# Altium PCB PCB1.PcbDoc (part 2 of 2)
Units mm, origin at the board's own origin, x right, y up, seen from the top; angles counter-clockwise.
Board outline 32 x 32 mm, 4 copper layers (Component Side, Ground Plane, Power Plane, Solder Side), stack 0.844 mm thick; 67 components, 43 nets, 247 pads, 412 vias.
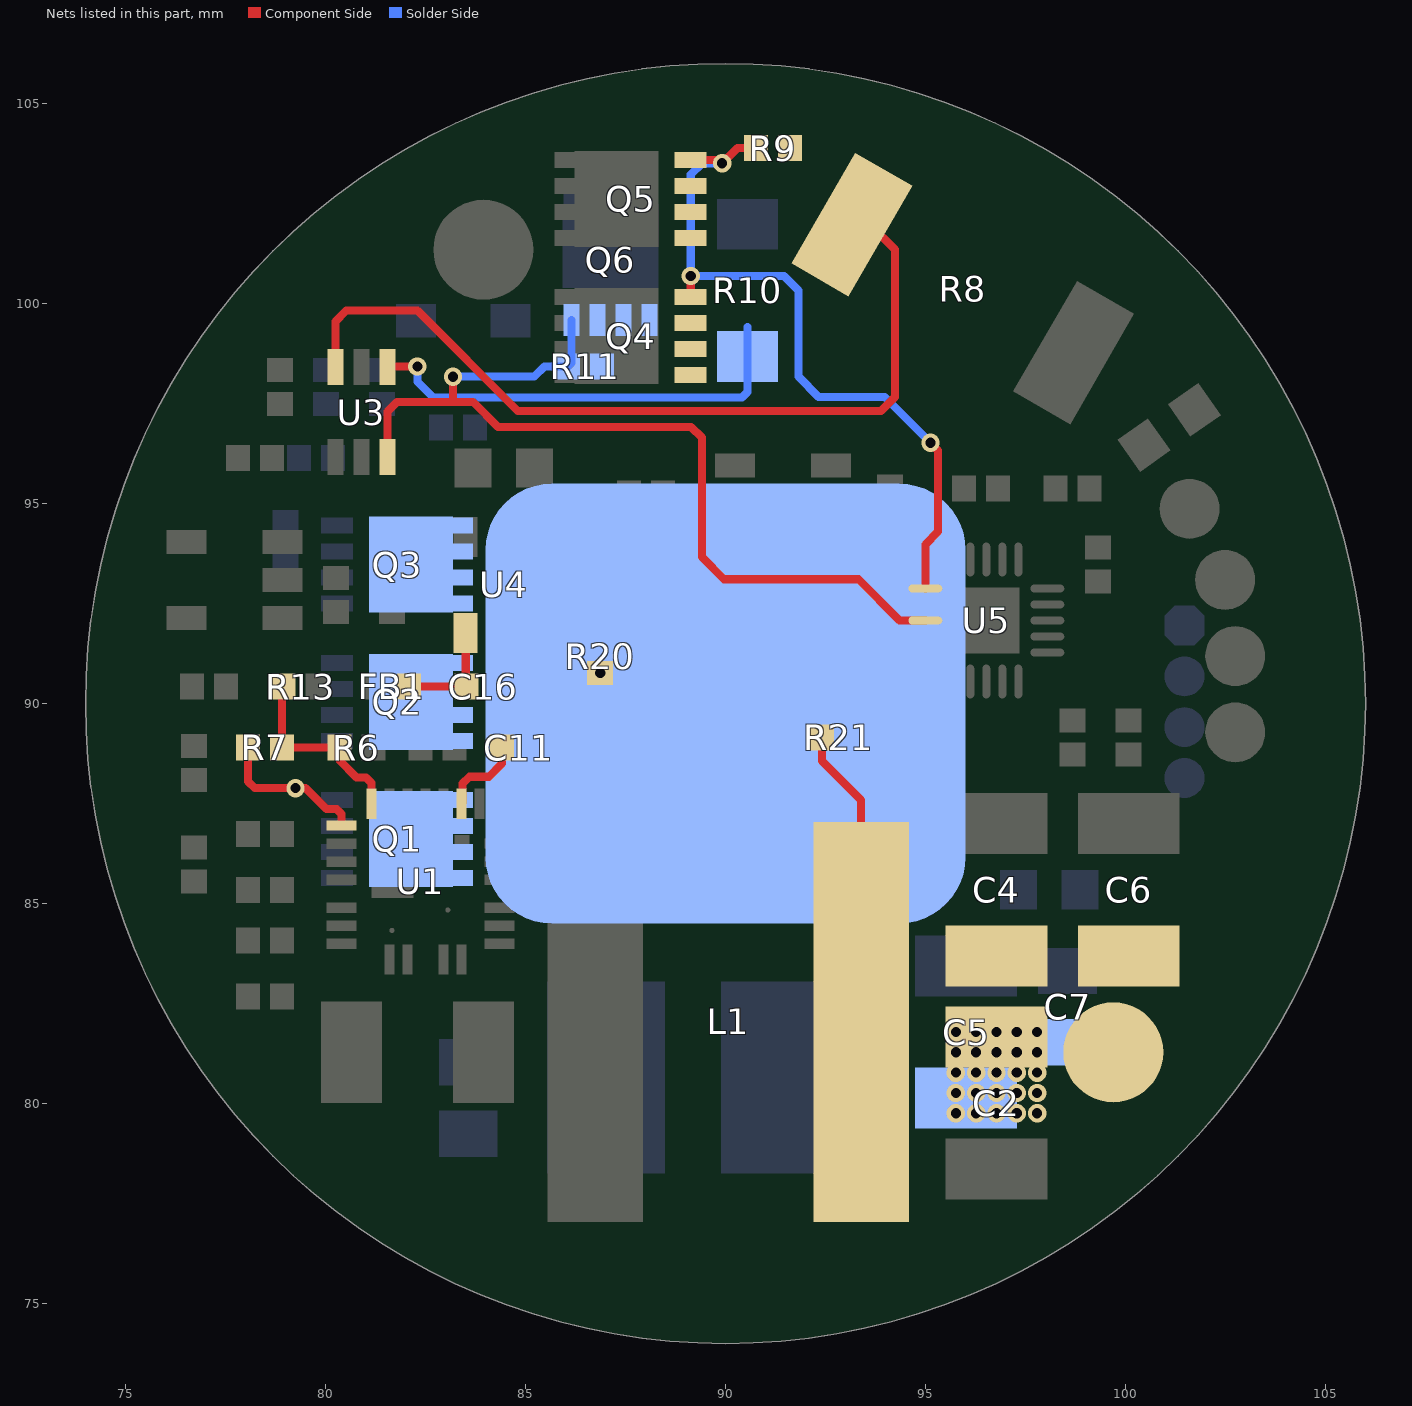
[diagram p4: the nets of this part, all layers, seen from the top]

## Via types
v1: diameter 0.457, hole 0.254, Component Side to Solder Side, tented both sides, 412 vias

## Nets (pads, with @x,y where several pads share a name; then routed paths per layer and width w, separated by ;. In a path a pad name is that pad's centre, name@x,y a point inside that pad or via, vN(x,y) a via of type N, cw(c..) or ccw(c..) an arc to the next point about the centre after c; other vN are vias at no path point) (continued)
VBAT: pad.6 Q1.5 Q1.6 Q1.7 Q1.8 Q2.5 Q2.6 Q2.7 Q2.8 Q3.5 Q3.6 Q3.7 Q3.8 R20.2
  other v1: 86.868,90.761
VDRV: C11.2 U1.12 | length 2.1
  Component Side w0.203: U1.12@83.398,87.496 83.426,87.524 83.426,87.997 83.599,88.169 84.083,88.169 84.411,88.497 C11.2@84.411,88.9
VFB: R6.1 R7.2 R13.2 U1.17 | length 4.9
  Component Side w0.203: R13.2@78.95,90.424 78.911,90.385 R7.2@78.911,88.9 R6.1@80.347,88.9 80.347,88.581 80.775,88.153 81.011,88.153 81.153,88.011 81.153,87.501 U1.17@81.148,87.496
VHIGH: Q4.1 Q4.2 Q4.3 Q5.1 Q5.2 Q5.3 R8.2 R9.1 U3.3 | length 21.4
  Component Side w0.203: U3.3@80.249,98.407 80.249,99.553 80.518,99.822 82.296,99.822 84.806,97.312 93.883,97.312 94.234,97.663 94.234,101.346 93.607,101.973 R8.2@93.161,101.973
VHSG: Q4.4 Q5.4 R9.2 U5.6 | length 18.7
  Component Side w0.203: Q4.4@89.13,100.162 v1(89.13,100.687) v1@89.154,100.711 ; Q5.4@89.13,103.591 89.83,103.591 v1(89.916,103.505) 90.297,103.886 R9.2@90.761,103.886 ; U5.6@94.995,92.875 94.995,93.979 95.316,94.3 95.316,96.327 v1(95.123,96.52)
  Solder Side w0.203: v1(89.916,103.505) 89.408,103.505 89.13,103.227 v1(89.13,100.687) 91.464,100.687 91.821,100.33 91.821,98.171 92.329,97.663 93.98,97.663 v1(95.123,96.52)
VLDO: C16.2 FB1.2 U4.1 | length 2.7
  Component Side w0.203: FB1.2@82.086,90.424 C16.2@83.522,90.424 83.505,90.441 U4.1@83.505,91.637
VLED+: C2.2 C4.2 C5.2 C6.2 C7.2 L1.2 pad.0@99.695,81.28 R7.1 R21.2 U1.18 | length 11.5
  Component Side w0.203: R7.1@78.061,88.9 78.061,88.055 78.232,87.884 v1(79.248,87.884) 79.502,87.884 80.025,87.361 80.279,87.361 80.398,87.242 U1.18@80.398,86.946 ; R21.2@92.412,89.281 92.412,88.563 93.391,87.584 L1.2@93.391,82.042
  other v1: 95.758,79.756 96.266,79.756 96.774,79.756 97.282,79.756 97.79,79.756 95.758,80.264 96.266,80.264 96.774,80.264 97.282,80.264 97.79,80.264 95.758,80.772 96.266,80.772 96.774,80.772 97.282,80.772 97.79,80.772 95.758,81.28 96.266,81.28 96.774,81.28 97.282,81.28 97.79,81.28 95.758,81.788 96.266,81.788 96.774,81.788 97.282,81.788 97.79,81.788
VLOW: Q6.1 Q6.2 Q6.3 R10.2 R11.2 U3.1 | length 11.2
  Component Side w0.203: U3.1@81.549,98.407 81.567,98.425 v1(82.296,98.425)
  Solder Side w0.203: v1(82.296,98.425) 82.296,98.044 82.692,97.648 90.409,97.648 90.551,97.79 R10.2@90.551,98.679 90.551,99.416
VLSG: Q6.4 R11.1 U3.6 U5.8 | length 23.5
  Component Side w0.203: U3.6@81.549,96.157 81.549,97.297 81.788,97.536 83.185,97.536 ; v1(83.185,98.171) 83.185,97.536 ; U5.8@94.995,92.075 94.352,92.075 93.32,93.106 89.963,93.106 89.408,93.661 89.408,96.647 89.139,96.916 84.313,96.916 83.693,97.536 83.185,97.536
  Solder Side w0.203: v1(83.185,98.171) 85.217,98.171 85.471,98.425 R11.1@86.062,98.425 86.147,98.51 Q6.4@86.147,99.592
pads on no net: U1.10 U1.11 U1.14 U1.28 U4.2 U5.13 U5.19

## Polygon pours and split planes (outlines as drawn)
GND on Solder Side "Component Side-No Net 1" (solid, remove dead copper, pour order 46): 72.898,108.331 72.898,75.946 74.549,74.295 76.2,72.644 107.95,72.644 107.95,73.787 111.506,77.343 111.252,77.597 111.252,104.14 111.252,106.045 109.093,108.204 108.839,108.458 96.774,108.458
12V on Solder Side "Component Side-No Net 1" (solid, remove dead copper, pour order 49): 78.476,94.039 75.497,94.039 75.438,93.98 75.692,93.726 75.692,83.947 75.692,83.82 77.597,81.915 77.851,82.169 79.629,82.169 79.629,93.599 79.248,93.98
GND on Solder Side "Component Side-No Net 1" (solid, remove dead copper, pour order 50): 78.359,80.01 78.486,79.883 85.344,79.883 85.429,79.883 88.625,83.079 88.858,83.312 94.234,83.312 94.234,74.93 93.98,74.676 82.804,74.676 79.375,74.676 78.232,75.819
GND on Solder Side "Component Side-No Net 1" (solid, remove dead copper, pour order 53): 82.296,84.963 83.947,84.963 83.947,83.185 82.042,83.185
VBAT on Solder Side "Component Side-No Net 1" (solid, remove dead copper, pour order 54): 83.566,95.885 96.012,95.885 96.012,84.455 88.138,84.455 84.709,84.455 83.82,85.344 83.693,85.471 81.026,85.471 81.026,94.742 83.566,94.742
VBAT on Solder Side "Component Side-No Net 1" (solid, remove dead copper, pour order 56): 84.709,84.455 80.518,84.455 80.518,86.36 81.026,86.868 85.217,86.868
GND on Solder Side "Component Side-No Net 1" (solid, remove dead copper, pour order 58): 82.371,85.145 93.798,85.145 94.234,84.709 94.234,82.931 82.169,82.931 82.042,83.058
VLED+ on Solder Side "Component Side-No Net 1" (solid, remove dead copper, pour order 61): 95.377,82.042 98.171,82.042 98.171,79.248 95.377,79.248
VLED+ on Solder Side "Component Side-No Net 1" (solid, remove dead copper, pour order 62): 94.742,82.042 94.869,82.169 99.314,82.169 99.314,80.899 99.187,80.772 98.679,80.772 98.552,80.772 98.425,80.645 98.298,80.518 98.298,79.629 98.298,79.375 98.171,79.248 95.377,79.248 94.742,79.248
GND on Solder Side "Component Side-No Net 1" (solid, remove dead copper, pour order 63): 87.63,84.201 88.138,84.709 104.013,84.709 104.013,76.327 104.267,76.073 100.076,71.882 93.98,71.882 88.646,71.882 88.519,72.009
VLOW on Solder Side "Component Side-No Net 1" (solid, remove dead copper, pour order 65): 86.487,100.203 86.487,97.917 91.44,97.917 91.44,100.203
LED- on Solder Side "Component Side-No Net 1" (solid, remove dead copper, pour order 66): 85.725,100.33 85.852,100.203 89.027,100.203 89.027,103.124 89.13,103.227 89.073,103.284 85.684,103.284
GND on Solder Side "Component Side-No Net 1" (solid, remove dead copper, pour order 67): 89.281,101.219 93.472,101.219 93.98,101.727 93.98,103.124 95.504,104.648 85.725,104.775 85.344,104.394 85.598,104.14 85.598,102.743
5V on Solder Side "Component Side-No Net 1" (solid, remove dead copper, pour order 73): 81.915,96.266 83.566,96.266 83.439,96.139 83.439,94.869 82.042,94.869 81.915,94.742
GND on Solder Side "Component Side-No Net 1" (solid, remove dead copper, pour order 79): 76.073,93.091 94.996,93.091 95.123,93.218 96.012,94.107 96.012,106.299 77.089,106.299 76.708,106.68
GND on Solder Side "Component Side-No Net 1" (solid, remove dead copper, pour order 85): 93.98,103.759 95.25,102.489 95.25,81.153 109.855,81.153 110.236,80.772 109.855,81.153 109.855,104.267
GND on Solder Side "Component Side-No Net 1" (solid, remove dead copper, pour order 86): 79.629,79.883 84.558,79.883 84.893,79.547 84.963,79.478 84.963,77.978 84.963,76.962 84.836,76.835 84.632,76.631 81.808,76.631
12V on Solder Side "Component Side-No Net 1" (solid, remove dead copper, pour order 87): 76.581,94.996 81.534,94.996 81.788,94.742 86.106,90.424 86.106,82.423 86.106,75.946 85.725,75.565 76.708,75.565 74.295,75.565 73.66,76.2
12V on Solder Side "Component Side-No Net 1" (solid, remove dead copper, pour order 88): 85.217,77.089 85.725,77.597 91.059,77.597 91.059,84.328 90.297,85.09 89.916,84.709 82.804,84.709 82.804,77.343 83.185,76.962
GND on Solder Side "Component Side-No Net 1" (solid, remove dead copper, pour order 45): 91.059,84.328 91.313,84.582 101.981,84.582 101.981,79.842 101.514,79.375 99.355,77.216 97.917,77.216 91.567,77.216 91.059,76.708
12V on Component Side "Component Side-No Net 1" (solid, remove dead copper, pour order 47): 81.026,84.963 82.296,84.963 82.296,80.01 82.042,80.01 80.772,80.01 79.629,80.01 79.629,82.55 79.629,83.058 80.264,83.693 80.772,83.693 80.899,83.82 80.899,84.836
GND on Component Side "Component Side-No Net 1" (solid, remove dead copper, pour order 48): 82.423,85.979 83.947,85.979 83.947,83.312 84.455,82.804 84.836,82.423 84.836,79.883 84.836,73.533 84.582,73.787 77.851,73.787 77.851,76.073 76.962,76.962 77.47,77.47 77.47,82.042 80.645,82.042 81.153,82.55
SW on Component Side "Component Side-No Net 1" (solid, remove dead copper, pour order 51): 83.969,86.173 84.029,86.233 84.709,86.233 84.836,86.233 84.963,86.36 84.963,86.868 84.963,86.995 85.09,87.122 88.011,87.122 88.011,77.089 87.884,76.962 85.979,76.962 84.455,76.962 83.271,78.146 83.271,83.471 83.271,86.02 83.185,86.106
GND on Component Side "Component Side-No Net 1" (solid, remove dead copper, pour order 52): 81.153,86.741 83.058,86.741 83.058,85.972 83.03,85.944 83.058,85.916 83.058,85.09 81.28,85.09 81.153,85.217
VLED+ on Component Side "Component Side-No Net 1" (solid, remove dead copper, pour order 59): 92.075,87.376 95.123,87.376 95.25,87.249 95.25,86.233 95.25,86.106 95.504,85.852 101.509,85.852 101.509,80.784 99.822,79.375 97.028,79.375 94.869,79.375 94.742,79.248 94.742,76.962 92.202,76.962 92.075,77.089
GND on Component Side "Component Side-No Net 1" (solid, remove dead copper, pour order 60): 95.123,88.011 105.791,88.011 105.918,87.884 106.172,87.63 106.172,79.375 106.172,72.898 105.791,72.517 105.537,72.263 89.916,72.263 84.455,72.263 83.058,73.66 83.439,74.041 83.439,77.47 84.525,77.47 85.033,76.962 93.218,76.962 94.615,76.962 94.742,77.089 94.742,79.629 94.742,87.63 95.123,88.011
LED- on Component Side "Component Side-No Net 1" (solid, remove dead copper, pour order 64): 82.55,102.743 84.836,102.743 85.217,102.743 85.471,102.997 85.471,104.14 88.392,104.14 88.519,104.013 88.646,103.886 88.646,97.663 84.836,97.663 82.55,99.949
GND on Component Side "Component Side-No Net 1" (solid, remove dead copper, pour order 68): 97.028,97.79 98.044,96.774 99.441,96.774 99.568,96.774 102.997,100.203 103.124,100.33 103.124,104.521 102.997,104.521 99.441,108.077 97.028,105.664 97.028,101.346
GND on Component Side "Component Side-No Net 1" (solid, remove dead copper, pour order 69): 97.028,101.727 83.058,101.727 81.407,103.378 82.804,104.775 82.804,107.442 82.931,107.442 83.693,108.204 98.552,108.204 98.552,103.554 100.183,101.923
GND on Component Side "Component Side-No Net 1" (solid, remove dead copper, pour order 70): 75.311,94.488 78.359,94.615 78.359,93.345 78.359,81.019 77.435,80.094 77.35,80.01 73.406,80.01 73.406,93.726 71.755,95.377
GND on Component Side "Component Side-No Net 1" (solid, remove dead copper, pour order 71): 79.8,91.015 79.8,95.294 80.137,95.631 81.534,95.631 82.169,95.631 82.55,96.012 83.185,96.647 83.185,99.822 83.185,105.41 83.058,105.537 82.423,104.902 71.501,104.902 71.501,97.917 71.12,97.536 71.12,93.091 71.12,91.948 71.501,91.567
5V on Component Side "Component Side-No Net 1" (solid, remove dead copper, pour order 72): 83.058,93.472 84.201,93.472 84.201,96.393 83.058,96.393 81.788,96.393 81.788,94.996 81.788,94.742 83.058,94.742
GND on Component Side "Component Side-No Net 1" (solid, remove dead copper, pour order 74): 84.709,96.52 86.868,96.52 86.868,95.504 86.741,95.377 86.36,95.377 86.106,95.377 85.979,95.25 85.979,92.964 85.979,90.043 85.852,89.916 84.201,89.916 84.074,89.916 83.947,90.043 83.947,91.059 84.074,91.059 84.836,91.059 84.836,93.726 84.582,93.98 84.582,96.393
GND on Component Side "Component Side-No Net 1" (solid, remove dead copper, pour order 75): 81.236,89.833 81.28,89.789 85.979,89.789 85.979,87.376 85.979,87.249 84.328,87.249 84.201,87.376 84.074,87.503 84.074,87.884 81.28,87.884 81.153,88.011 80.645,88.519 80.645,88.646 80.645,89.662
GND on Component Side "Component Side-No Net 1" (solid, remove dead copper, pour order 76): 79.339,95.664 79.372,95.631 84.074,95.631 84.074,93.345 83.947,93.218 83.947,92.329 83.947,90.678 83.82,90.551 82.694,89.425 79.013,89.425 78.215,89.425 78.105,89.535 76.454,91.186 76.454,95.631
GND on Component Side "Component Side-No Net 1" (solid, remove dead copper, pour order 77): 79.849,96.259 83.235,96.259 84.398,95.096 84.702,94.791 85.959,94.791 85.959,98.953 85.598,99.314 84.074,100.838 84.074,102.235 78.867,102.235 78.232,101.6
5V on Component Side "Component Side-No Net 1" (solid, remove dead copper, pour order 78): 81.788,94.742 81.788,97.536 83.693,97.536 84.313,96.916 84.567,96.916 84.709,96.774 84.836,96.647 84.836,93.726 83.566,93.726 83.439,93.599 83.185,93.853 81.407,93.853
GND on Component Side "Component Side-No Net 1" (solid, remove dead copper, pour order 80): 85.979,87.409 86.2,87.63 89.535,87.63 94.361,87.63 94.996,88.265 95.123,88.392 96.901,88.392 96.901,96.774 96.647,97.028 96.363,97.312 93.472,97.312 82.266,97.312 82.042,97.536 82.048,97.53 82.048,87.496
GND on Component Side "Component Side-No Net 1" (solid, remove dead copper, pour order 81): 91.226,91.382 92.422,91.382 92.529,91.275 94.45,91.275 94.45,92.164 94.742,92.456 94.092,93.106 91.642,93.106 90.693,93.106 90.424,92.837 90.551,92.71 90.551,91.059
VHIGH on Component Side "Component Side-No Net 1" (solid, remove dead copper, pour order 82): 88.449,97.663 92.71,97.663 93.599,97.663 93.853,97.917 93.853,100.076 93.853,100.711 93.472,101.092 93.472,101.973 94.242,101.973 94.488,101.727 95.25,101.727 95.25,103.632 95.123,103.759 94.869,104.013 93.472,104.013 92.71,104.013 92.456,104.267 92.329,104.394 91.186,104.394 91.186,104.013 91.059,103.886 90.868,104.077 88.455,104.077
GND on Component Side "Component Side-No Net 1" (solid, remove dead copper, pour order 83): 87.757,97.536 96.901,97.536 97.409,97.028 97.906,96.531 99.695,96.531 101.219,96.647 101.727,96.139 102.616,95.25 102.616,94.742 102.616,94.488 103.124,93.98 103.378,93.726 103.378,92.964 103.378,91.948 103.632,91.694 103.632,90.043 103.632,88.519 103.378,88.265 96.774,88.265 94.488,88.265 94.361,88.392 94.117,88.636 93.755,88.636
GND on Component Side "Component Side-No Net 1" (solid, remove dead copper, pour order 84): 95.32,102.033 94.742,101.455 94.742,97.79 97.028,97.79 97.409,97.409 99.06,97.409 100.711,97.409 101.092,97.028 102.489,95.631 102.489,94.996 102.489,93.345 102.87,92.964 102.997,92.837 102.997,92.583 102.997,92.456 103.505,91.948 103.632,91.821 103.632,91.059 103.632,90.551 103.251,90.17 102.235,90.17 101.197,90.17 100.853,89.826 100.584,89.557 100.584,88.392 99.314,88.392 99.314,87.376 108.077,87.376 108.204,87.249 108.331,87.376 108.331,103.759 103.378,103.759 99.06,108.077
GND on Component Side "Component Side-No Net 1" (solid, remove dead copper, pour order 57): 84.201,96.774 84.328,96.647 86.614,96.647 86.614,92.837 86.36,92.583 86.106,92.329 86.106,90.678 85.217,90.678 84.963,90.932 84.455,91.44 84.455,92.71 84.455,94.361 84.074,94.742 83.947,94.869 83.947,96.901
GND on Component Side "Component Side-No Net 1" (solid, remove dead copper, pour order 55): 88.138,96.647 88.138,92.964 88.265,93.091 89.662,93.091 89.662,96.901 89.408,97.155 89.281,97.028 88.392,97.028
GND on Ground Plane (split plane): 79.198,99.73 79.24,99.702 79.29,99.693 85.163,99.693 85.711,99.145 85.753,99.117 85.802,99.107 88.653,99.107 88.671,99.111 88.681,99.095 88.723,99.067 88.773,99.058 93.926,99.058 95.666,97.317 95.708,97.289 95.758,97.28 96.847,97.28 98.679,95.448 98.679,88.575 98.371,88.267 82.731,88.267 81.663,89.335 81.663,91.948 81.654,91.998 81.626,92.04 81.372,92.294 81.33,92.322 81.28,92.331 74.686,92.331 74.754,92.751 74.862,93.293 74.989,93.831 75.136,94.365 75.301,94.892 75.485,95.414 75.687,95.929 75.908,96.436 76.147,96.934 76.403,97.424 76.677,97.905 76.967,98.376 77.275,98.835 77.598,99.284 77.937,99.721 78.292,100.145 78.525,100.404
GND on Ground Plane (split plane): 203 vertices, not listed, extent 74.508,74.508 105.492,105.492
5V on Power Plane (split plane): 97.952,96.301 97.994,96.273 98.044,96.264 99.387,96.264 101.979,93.672 101.979,88.065 101.219,87.305 101.094,87.43 101.094,89.154 101.085,89.204 101.057,89.246 100.168,90.135 100.126,90.163 100.076,90.172 99.368,90.172 98.554,90.986 98.554,94.361 98.545,94.411 98.517,94.453 98.136,94.834 98.094,94.862 98.044,94.871 97.282,94.871 97.232,94.862 97.19,94.834 97.063,94.707 97.035,94.665 97.026,94.615 97.026,94.107 97.035,94.057 97.063,94.015 97.534,93.545 97.534,89.916 97.543,89.866 97.571,89.824 98.079,89.316 98.121,89.288 98.171,89.279 99.768,89.279 100.201,88.846 100.201,87.43 99.895,87.124 85.398,87.124 84.166,88.357 84.124,88.385 84.074,88.394 82.604,88.394 82.301,88.697 82.301,92.202 82.291,92.252 82.263,92.294 82.221,92.322 82.171,92.331 81.028,92.331 81.028,95.123 81.019,95.173 80.991,95.215 80.737,95.469 80.695,95.497 80.645,95.506 80.393,95.506 80.393,96.466 80.445,96.518 83.131,96.518 83.437,96.212 83.437,94.996 83.446,94.946 83.474,94.904 83.982,94.396 84.024,94.368 84.074,94.359 90.551,94.359 90.601,94.368 90.643,94.396 90.897,94.65 90.925,94.692 90.934,94.742 90.934,96.139 90.934,96.774 90.925,96.824 90.897,96.866 90.643,97.12 90.601,97.148 90.551,97.157 89.789,97.157 89.739,97.148 89.697,97.12 89.606,97.028 88.013,97.028 88.013,98.169 96.085,98.169
NetD2_1 on Power Plane (split plane): 87.755,98.244 87.755,95.506 86.616,95.506 86.616,97.79 86.607,97.84 86.579,97.882 86.325,98.136 86.283,98.164 86.233,98.173 84.636,98.173 84.203,98.606 84.203,99.006 84.255,99.058 86.941,99.058
OPOUT on Power Plane (split plane): 98.296,94.307 98.296,90.932 98.305,90.882 98.333,90.84 99.222,89.951 99.264,89.923 99.314,89.914 100.022,89.914 100.836,89.1 100.836,87.376 100.845,87.326 100.873,87.284 101.036,87.122 100.276,86.362 84.89,86.362 83.658,87.595 83.616,87.623 83.566,87.632 81.028,87.632 81.028,92.073 82.042,92.073 82.042,88.644 82.052,88.594 82.08,88.552 82.458,88.173 82.5,88.145 82.55,88.136 84.02,88.136 85.252,86.903 85.294,86.875 85.344,86.866 99.949,86.866 99.999,86.875 100.041,86.903 100.422,87.284 100.45,87.326 100.459,87.376 100.459,88.9 100.45,88.95 100.422,88.992 99.914,89.5 99.872,89.528 99.822,89.537 98.225,89.537 97.792,89.97 97.792,93.599 97.783,93.649 97.755,93.691 97.284,94.161 97.284,94.561 97.336,94.613 97.99,94.613
12V on Power Plane (split plane): 82.167,85.163 82.167,80.445 82.115,80.393 79.683,80.393 79.377,80.699 79.377,83.131 80.737,84.49 80.765,84.532 80.774,84.582 80.774,85.215 82.115,85.215
DCDCEN on Power Plane (split plane): 79.918,97.444 79.96,97.416 80.01,97.407 83.893,97.407 84.326,96.974 84.326,95.631 84.335,95.581 84.363,95.539 84.617,95.285 84.659,95.257 84.709,95.248 89.281,95.248 89.331,95.257 89.373,95.285 89.627,95.539 89.655,95.581 89.664,95.631 89.664,96.72 89.843,96.899 90.497,96.899 90.676,96.72 90.676,96.139 90.676,94.796 90.497,94.617 84.128,94.617 83.695,95.05 83.695,96.266 83.686,96.316 83.658,96.358 83.277,96.739 83.235,96.767 83.185,96.776 80.391,96.776 80.341,96.767 80.299,96.739 80.172,96.612 80.144,96.57 80.135,96.52 80.135,95.506 80.01,95.506 79.96,95.497 79.918,95.469 79.029,94.58 79.001,94.538 78.992,94.488 78.992,90.68 76.254,90.68 76.075,90.859 76.075,91.513 76.254,91.692 77.47,91.692 77.52,91.701 77.562,91.729 78.07,92.237 78.098,92.279 78.107,92.329 78.107,96.647 78.107,97.482 78.54,97.915 79.448,97.915
GRP on Power Plane (split plane): 82.548,101.165 82.548,99.876 82.496,99.824 79.248,99.824 79.198,99.815 79.156,99.787 78.648,99.279 78.62,99.237 78.611,99.187 78.611,98.173 78.486,98.173 78.436,98.164 78.394,98.136 77.886,97.628 77.858,97.586 77.849,97.536 77.849,96.647 77.849,96.52 77.849,92.383 77.416,91.95 76.2,91.95 76.15,91.941 76.108,91.913 75.854,91.659 75.826,91.617 75.817,91.567 75.817,90.805 75.826,90.755 75.854,90.713 76.108,90.459 76.15,90.431 76.2,90.422 79.121,90.422 79.171,90.431 79.213,90.459 79.241,90.501 79.25,90.551 79.25,94.434 80.064,95.248 80.591,95.248 80.77,95.069 80.77,87.632 79.758,87.632 79.758,88.265 79.749,88.315 79.721,88.357 79.679,88.385 79.629,88.394 79.25,88.394 79.25,89.281 79.241,89.331 79.213,89.373 79.171,89.401 79.121,89.41 74.52,89.41 74.518,89.447 74.508,89.979 74.51,90 74.508,90.021 74.518,90.553 74.548,91.105 74.597,91.656 74.666,92.205 74.754,92.751 74.862,93.293 74.989,93.831 75.136,94.365 75.301,94.892 75.485,95.414 75.687,95.929 75.908,96.436 76.147,96.934 76.403,97.424 76.677,97.905 76.967,98.376 77.275,98.835 77.598,99.284 77.937,99.721 78.292,100.145 78.662,100.556 79.046,100.954 79.444,101.338 79.757,101.62 82.093,101.62
GND on Power Plane (split plane): 265 vertices, not listed, extent 74.534,74.508 105.492,105.492
VLED+ on Power Plane (split plane): 79.5,87.503 79.509,87.453 79.537,87.411 79.579,87.383 79.629,87.374 83.512,87.374 84.707,86.179 84.707,81.915 84.716,81.865 84.744,81.823 86.903,79.664 86.945,79.636 86.995,79.627 94.996,79.627 95.046,79.636 95.088,79.664 95.215,79.791 95.243,79.833 95.252,79.883 95.252,81.734 95.685,82.167 98.117,82.167 98.423,81.861 98.423,79.683 97.99,79.25 86.414,79.25 84.33,81.334 84.33,85.852 84.321,85.902 84.293,85.944 83.531,86.706 83.489,86.734 83.439,86.743 79.429,86.743 78.869,87.303 78.869,87.957 79.048,88.136 79.5,88.136

## Keep-outs
Keep-Out Layer:
  circle w0.254: c90,90 r16

## Other copper
Ground Plane (plane layer: these items are gaps in the copper):
  lines w0.254: 74.168,92.202 81.28,92.202 81.534,91.948 81.534,89.281 82.677,88.138 98.425,88.138 98.808,88.521 98.808,95.502 96.901,97.409 95.758,97.409 93.98,99.187 88.773,99.187 ; 78.251,100.861 79.29,99.822 85.217,99.822 85.802,99.237 88.653,99.237
Power Plane (plane layer: these items are gaps in the copper):
  rectangle: 87.884,95.631 89.535,97.028
  rectangle: 89.281,96.774 89.606,97.028
  rectangle: 87.884,95.504 89.408,95.758
  lines w0.254: 74.012,89.372 74.103,89.281 79.121,89.281 79.121,88.328 79.184,88.265 ; 75.946,97.663 76.454,98.171 ; 77.978,96.52 77.978,97.536 78.486,98.044 79.502,98.044 80.01,97.536 83.947,97.536 84.455,97.028 84.455,95.631 84.709,95.377 89.281,95.377 89.535,95.631 89.535,96.774 89.789,97.028 90.551,97.028 90.805,96.774 90.805,96.139 90.805,94.742 90.551,94.488 84.074,94.488 83.566,94.996 83.566,96.266 83.185,96.647 80.391,96.647 80.264,96.52 80.264,95.377 ; 77.978,96.647 77.978,92.329 77.47,91.821 77.343,91.821 76.2,91.821 75.946,91.567 75.946,90.805 76.2,90.551 77.089,90.551 79.121,90.551 79.121,94.488 80.01,95.377 80.645,95.377 80.899,95.123 80.899,87.574 80.828,87.503 79.629,87.503 79.629,88.265 78.994,88.265 78.74,88.011 78.74,87.249 79.375,86.614 83.439,86.614 84.201,85.852 84.201,81.28 86.36,79.121 98.044,79.121 98.552,79.629 98.552,81.915 98.171,82.296 95.631,82.296 95.123,81.788 95.123,79.883 94.996,79.756 86.995,79.756 84.836,81.915 84.836,86.233 ; 78.74,98.044 78.74,99.187 79.248,99.695 82.55,99.695 82.677,99.822 82.677,101.219 82.147,101.749 79.139,101.749 ; 80.328,87.503 83.566,87.503 84.836,86.233 ; 80.899,92.202 82.171,92.202 82.171,88.644 82.55,88.265 84.074,88.265 85.344,86.995 99.949,86.995 100.33,87.376 100.33,88.9 99.822,89.408 98.171,89.408 97.663,89.916 97.663,93.599 97.155,94.107 97.155,94.615 97.282,94.742 98.044,94.742 98.425,94.361 98.425,90.932 99.314,90.043 100.076,90.043 100.965,89.154 100.965,87.376 101.219,87.122 ; 86.487,95.377 86.487,97.79 86.233,98.044 84.582,98.044 84.074,98.552 84.074,99.06 84.201,99.187 86.995,99.187 87.884,98.298 ; 87.884,95.377 87.884,98.298 ; 84.836,86.233 100.33,86.233 102.108,88.011 102.108,93.726 99.441,96.393 98.044,96.393 96.139,98.298 87.884,98.298 ; 79.248,80.645 79.629,80.264 82.169,80.264 82.296,80.391 82.296,85.217 82.169,85.344 80.645,85.344 80.645,84.582 79.248,83.185 79.248,80.645

## Silkscreen, mask and mechanical layers (free items; w line width, h text height)
Top Overlay:
  circle w0.254: c90,90 r15
  rectangle: 91.14,93.496 91.74,93.98
  rectangle: 90.505,90.086 91.105,90.551
  rectangle: 77.424,91.591 78.024,91.948
  lines w0.254: 101.219,81.28 102.362,82.423 102.362,82.804
  text "烫" at 89.789,101.6 h1.6
  text "LED" at 82.677,99.06 h1.5
  text "241101" at 90.17,98.171 h1.6
  text "-" at 83.439,97.536 h3.05
  text "XRLite V1" at 90.17,96.774 h1.6
  text "Gr" at 101.981,95.758 h1.6 r320
  text "R" at 100.711,92.583 h1.6
  text "G" at 100.838,90.678 h1.6
  text "K" at 101.092,88.773 h1.6
  text "JLCJLCJLCJLC" at 88.392,86.995 h1.6 r270
  text "LED+" at 102.87,83.185 h1.5 r90
  text "抄板全家死光" at 91.821,77.724 h1.6 r90
Bottom Overlay:
  circle w0.254: c90,90 r14
  text "Designed by:" at 99.949,97.79 h1.6 r325
  text "VBAT(6-12.6V)" at 95.377,96.139 h1.6
  text "G" at 103.251,92.456 h1.6 r90
  text "V" at 103.251,91.059 h1.6 r90
  text "D" at 103.251,89.789 h1.6 r90
  text "C" at 103.251,88.646 h1.6 r90
  text "Lite Edition" at 96.52,86.614 h2 r270
  text "Xtern Ripper" at 98.298,86.487 h2.2 r270
  text "RCFG" at 101.092,86.233 h1.6 r90
  text "V1.1" at 84.963,83.185 h2
Top Solder:
  circle w1: c90,90 r15.5
  rectangle: 83.222,86.135 83.606,86.719
  rectangle: 82.709,77.216 84.709,79.216
Bottom Solder:
  circle w2: c90,90 r15
  rectangle: 77.248,90.805 79.248,92.805
  rectangle: 77.248,88.392 79.248,90.392
  rectangle: 77.248,85.344 79.248,87.344
  rectangle: 78.899,82.55 80.899,84.55
  text "PR" at 85.09,100.711 h1.6
  text "Redstoner_35" at 98.552,96.901 h1.6 r325